# Altium PCB Power_Board_Layout_V2.PcbDoc (part 2 of 2)
Units mil, origin at the board's own origin, x right, y up, seen from the top; angles counter-clockwise.
Board outline 3500 x 4000 mil, 4 copper layers (Top Layer, GND, Power, Bottom Layer), stack 61.417 mil thick; 67 components, 53 nets, 226 pads, 441 vias.
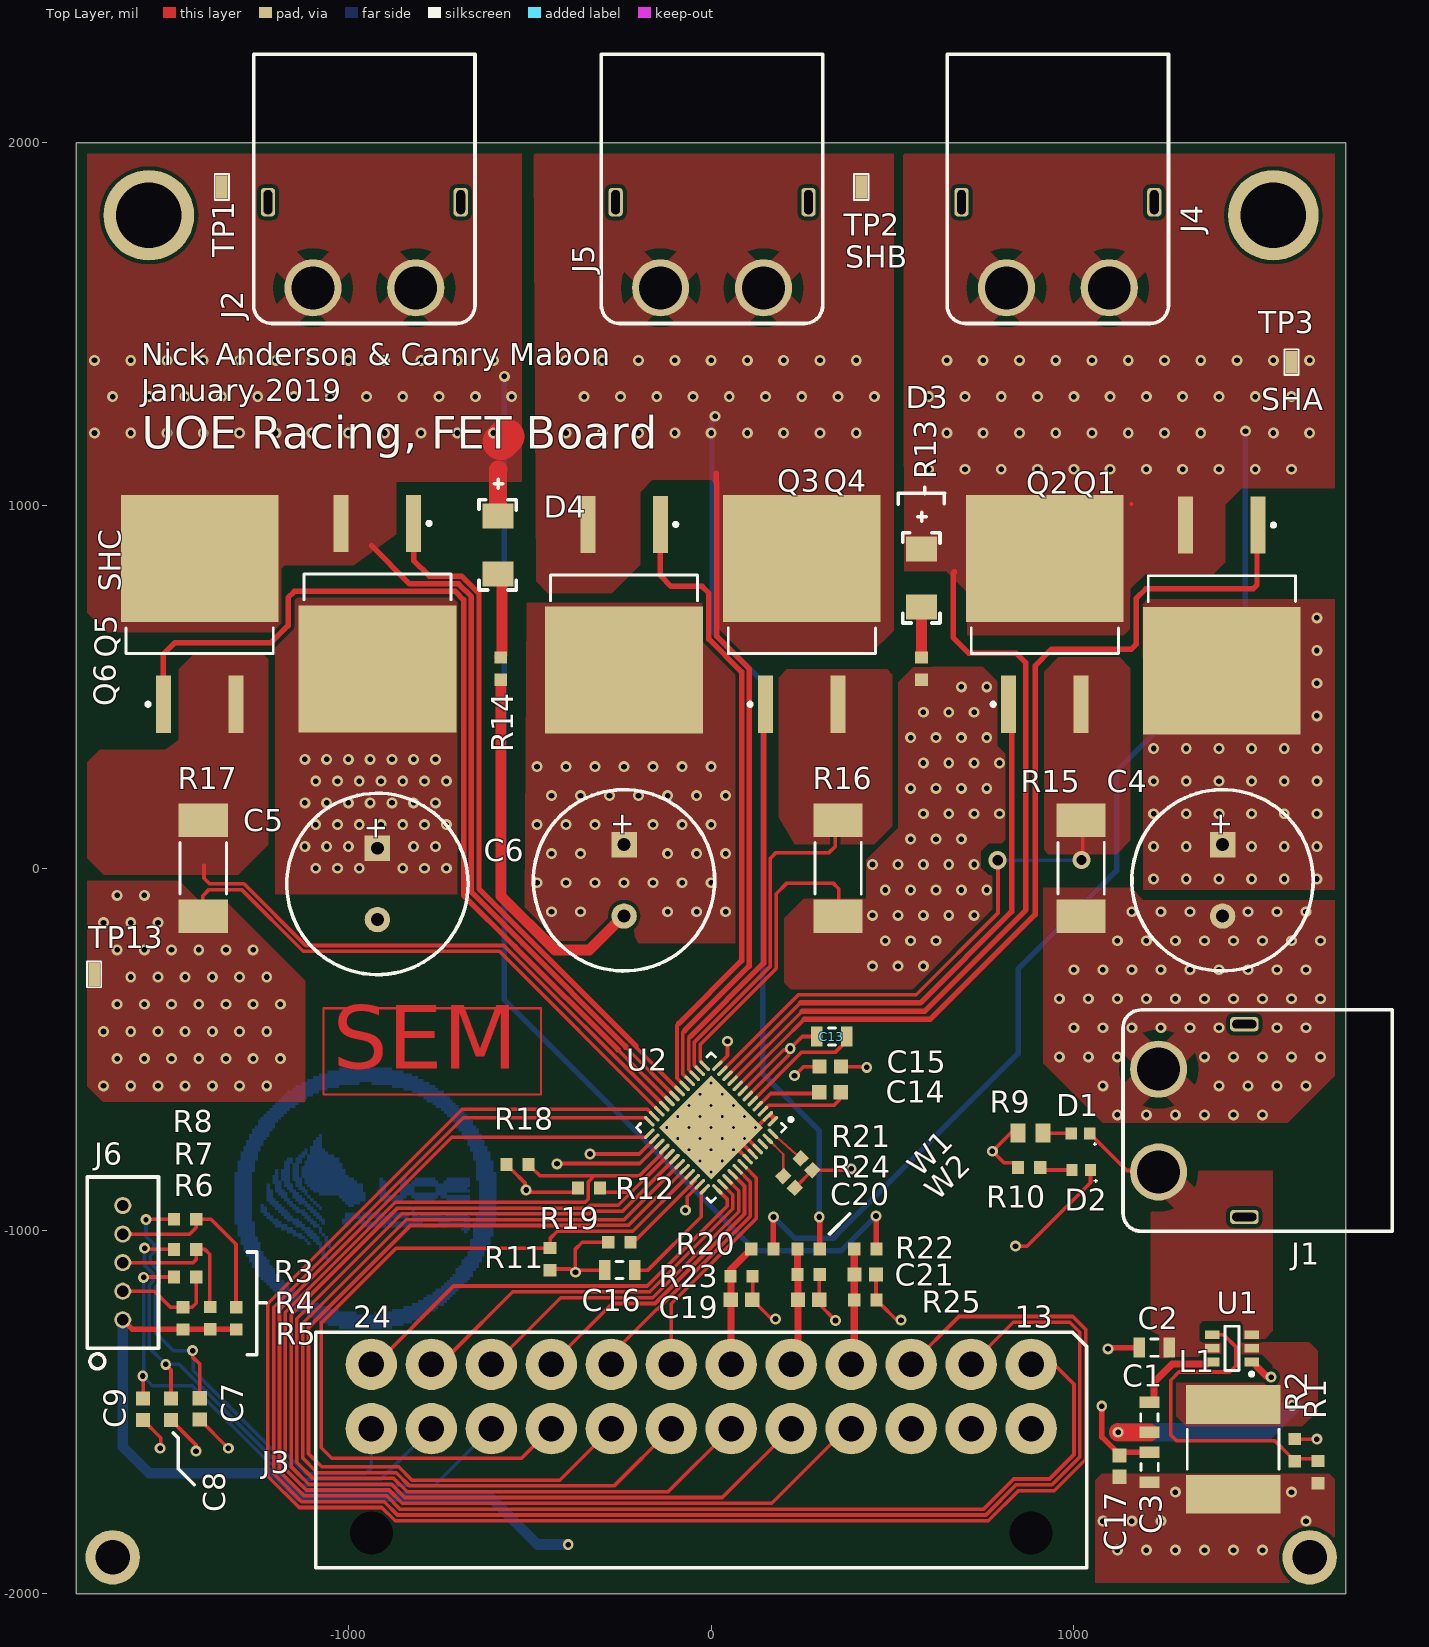
[diagram p0: Top Layer view]

## Other copper (continued)
Bottom Layer: (continued)
  region: -1233,-934 -1225,-934 -1225,-942 -1225,-950 -1217,-950 -1217,-958 -1209,-958 -1209,-966 -1193,-966 -1193,-974 -1185,-974 -1185,-982 -1169,-982 -1169,-990 -1153,-990 -1153,-998 -1145,-998 -1145,-1006 -1129,-1006 -1129,-1014 -1121,-1014 -1121,-1022 -1113,-1022 -1113,-1030 -1105,-1030 -1105,-1038 -1113,-1038 -1113,-1030 -1121,-1030 -1121,-1022 -1137,-1022 -1137,-1014 -1153,-1014 -1153,-1006 -1169,-1006 -1169,-998 -1185,-998 -1185,-990 -1201,-990 -1201,-982 -1209,-982 -1209,-974 -1217,-974 -1217,-966 -1225,-966 -1225,-958 -1233,-958 -1233,-950 -1241,-950 -1241,-942 -1241,-934 -1241,-926 -1233,-926
GND (plane layer: these items are gaps in the copper):
  lines w10: -1750,-488 -1750,-672 -1741,-681 -344.49,-681 -138,-887.49 -138,-1014 ; 111,-903 846,-903 1124,-1181 1750,-1181
Power (plane layer: these items are gaps in the copper):
  lines w10: -1053,-1986 -1039,-2000 1749,-2000 1751,-1998 1751,-1850
  lines w40: -1053,-1986 -1053,-1227 -547,-721 621,-721 1006,-1106 ; 1004,-1105 1748,-1105

## Silkscreen, mask and mechanical layers (free items; w line width, h text height)
Top Overlay:
  lines w10: -1483,-1557 -1469,-1571 -1469,-1656 -1425,-1700 ; -1279,-1058 -1253,-1058 -1253,-1341 -1278,-1341 ; -1253,-1198 -1226,-1198 ; 326,-1008 326,-1007.37 327.63,-1007.37 382,-953 ; 516,1003 516,1034 643.55,1034 643,1033.45 643,1005 ; 589,1033 589,1050
  text "SHB" at 370,1656 h60
  text "Nick Anderson & Camry Mabon" at -1571,1386 h60
  text "January 2019" at -1571,1287 h60
  text "SHA" at 1516,1262 h60
  text "UOE Racing, FET Board" at -1569,1157 h90
  text "SHC" at -1628,762 h60 r90
Bottom Overlay:
  drawing of 14 lines, arcs and shapes, not listed
Board Outline:
  lines w0: -1750,-2000 1750,-2000 1750,2000 -1750,2000 ; 1760,-2265 1760,1735

## Text inside footprints (layer, text, board x,y; h text height)
C4: Top Overlay "+" at 1380,155 h60 r270
C5: Top Overlay "+" at -950,145 h60 r270
C6: Top Overlay "+" at -270,155 h60 r270
J3: Top Overlay "13" at 837.74,-1266.42 h60; Top Overlay "24" at -987.26,-1266.42 h60